# Altium PCB Trasmettitore_IR-1.1.PcbDoc
Units mm, origin at the board's own origin, x right, y up, seen from the top; angles counter-clockwise.
Board outline 27.4 x 16.4 mm, 4 copper layers (Top Layer, MidLayer1, MidLayer2, Bottom Layer); 62 components, 52 nets, 214 pads, 76 vias.
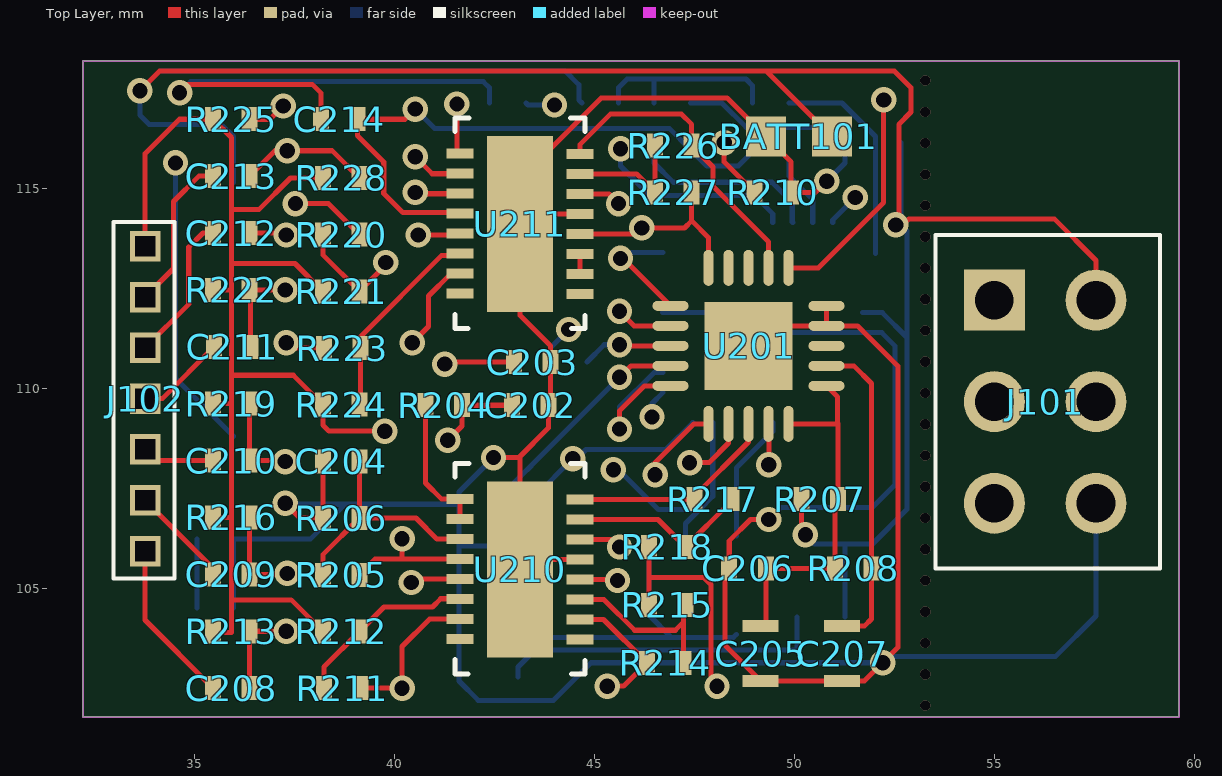
[diagram p0: Top Layer view]
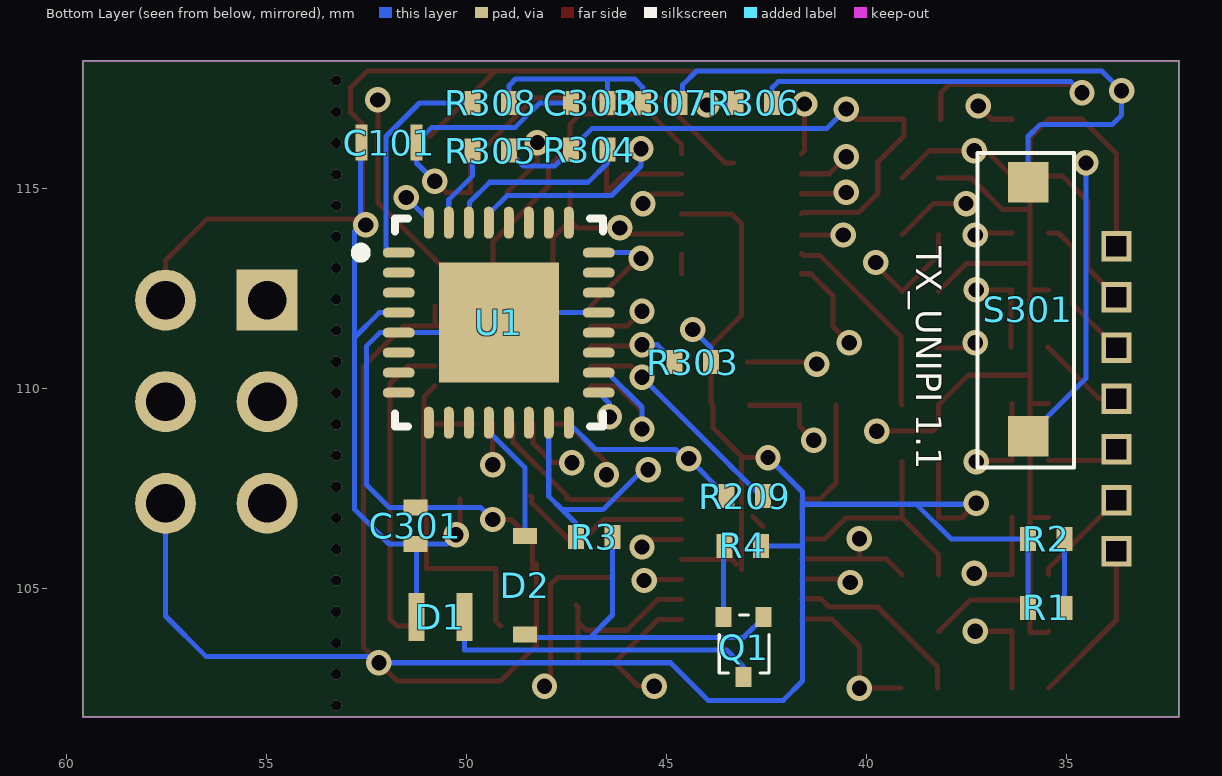
[diagram p1: Bottom Layer view, seen from below]
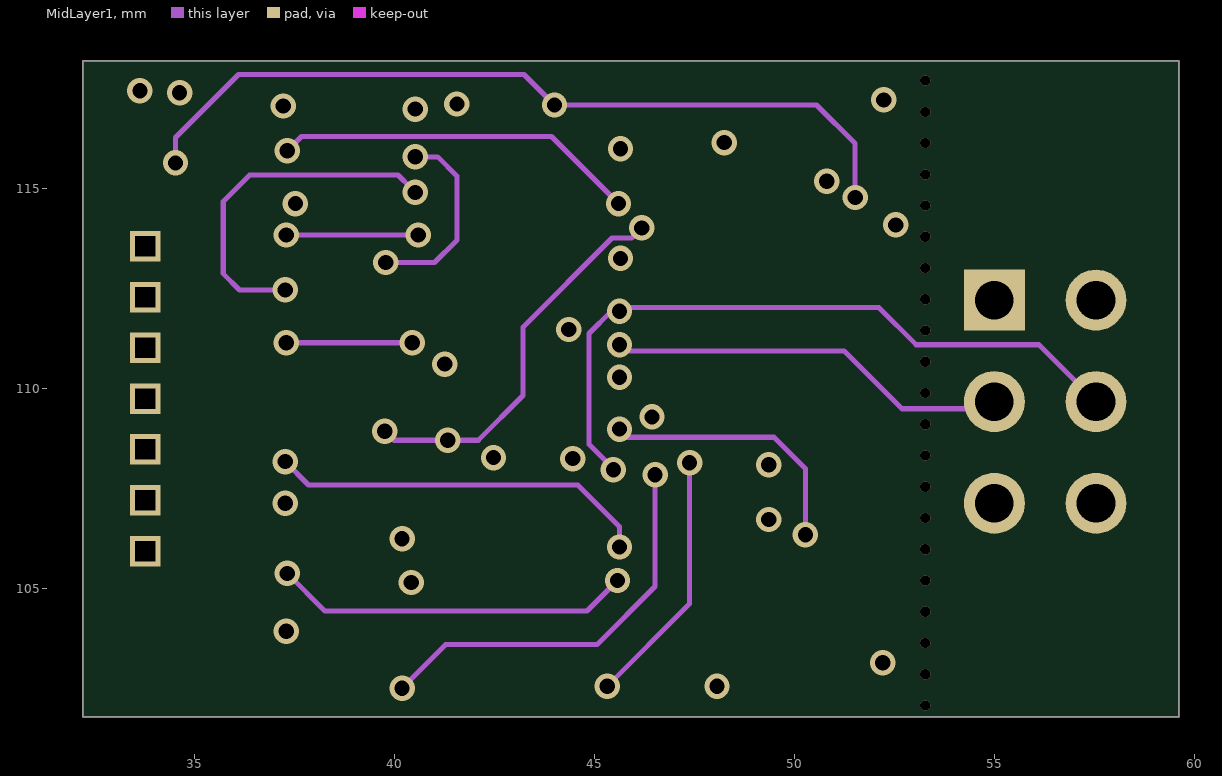
[diagram p2: MidLayer1]
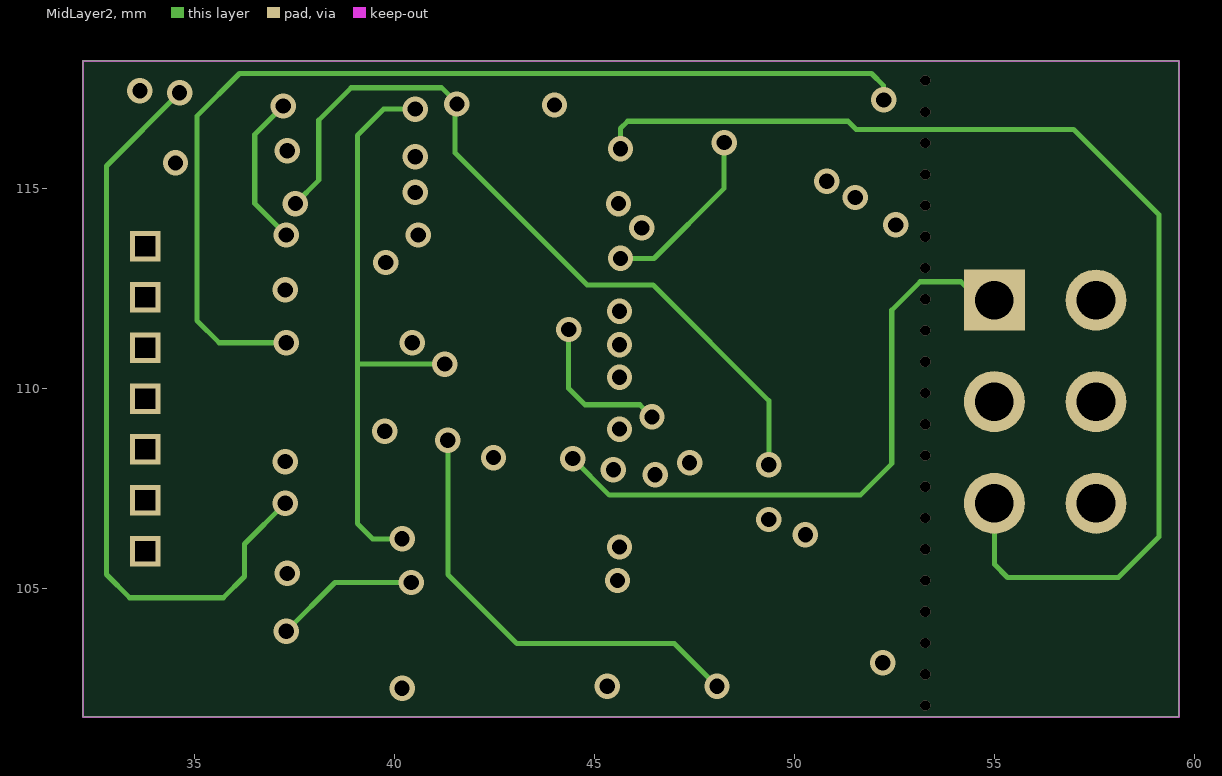
[diagram p3: MidLayer2]
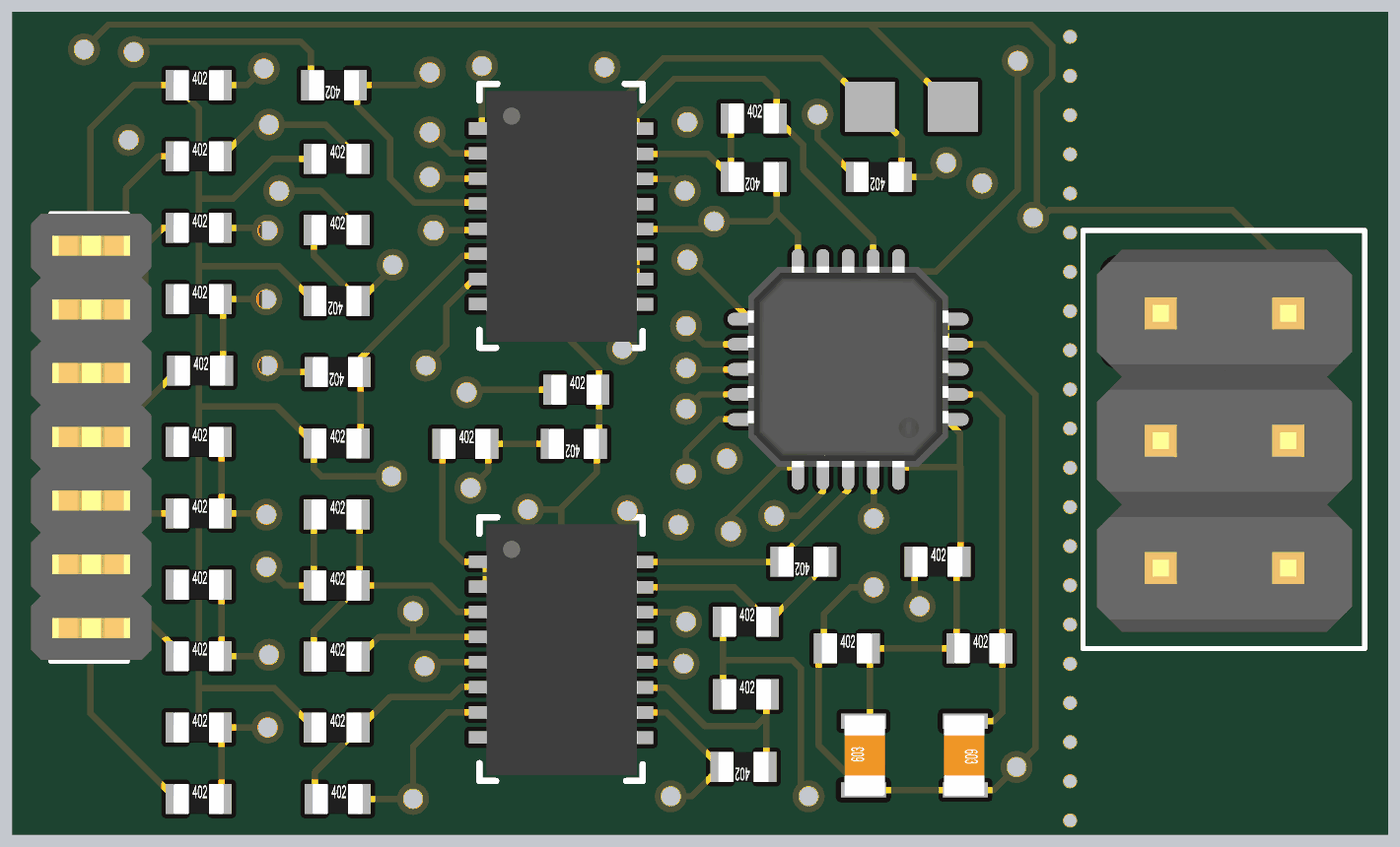
[diagram p4: 3D render of the assembled board from above, using the file's embedded part models]
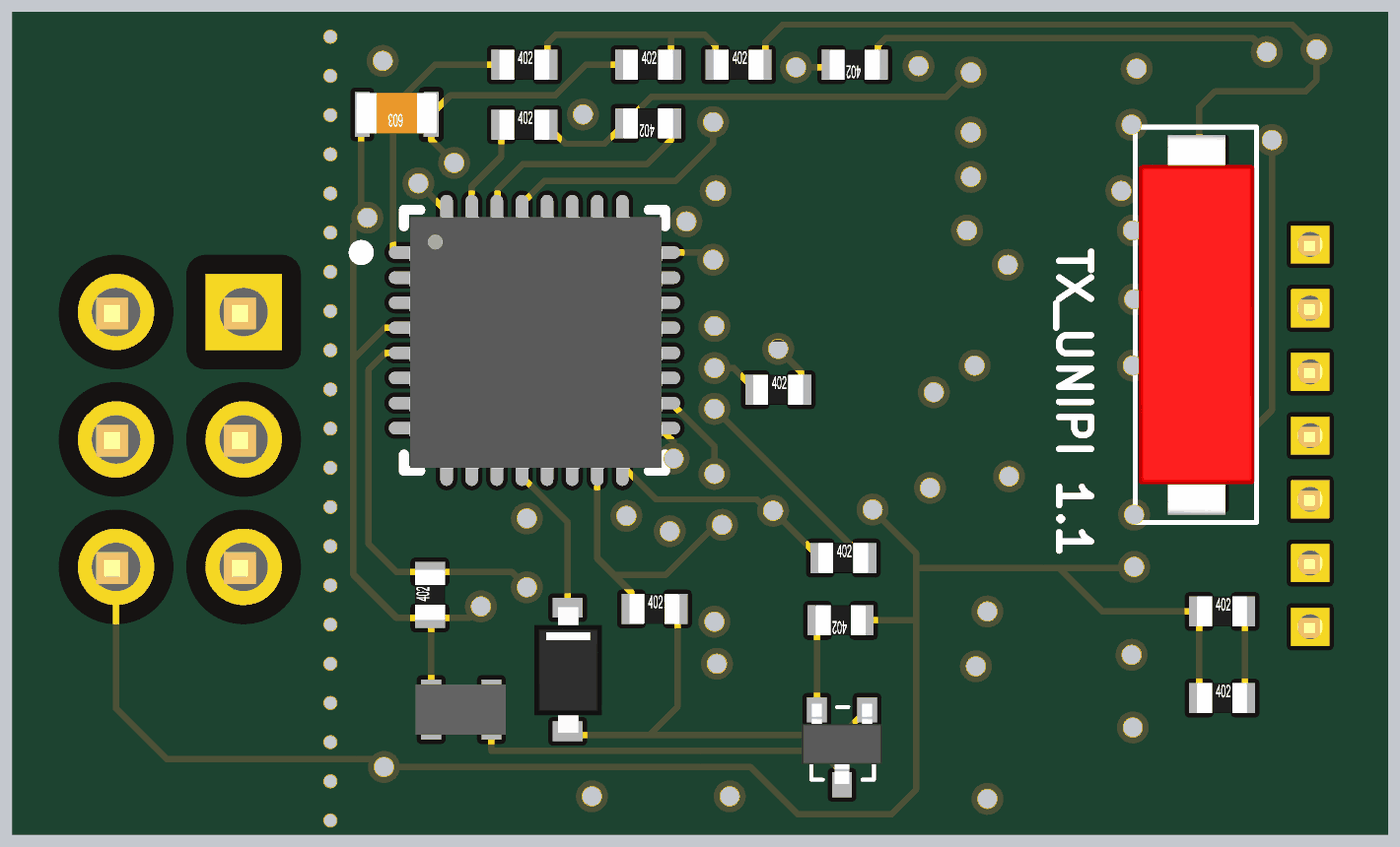
[diagram p5: 3D render of the assembled board from below, using the file's embedded part models]

## Layer stack, top to bottom
Top Layer: signal copper 0.0356
Dielectric: core 0.32, FR-4, Dk 4.8
MidLayer1: signal copper 0.0356
Dielectric: prepreg 0.32, FR-4, Dk 4.8
MidLayer2: signal copper 0.0356
Dielectric: core 0.32, FR-4, Dk 4.8
Bottom Layer: signal copper 0.0356

## Board outline
32.2,101.8 32.2,118.2 59.6,118.2 59.6,101.8

## Design rules (kind name [scope] priority, off if disabled: settings)
Clearance [All] p1: gap=0.127
HoleSize [All] p1: absolutevalues=TRUE maxlimit=1.27 minlimit=0.025 maxpercent=80.000 minpercent=20.000
MinimumSolderMaskSliver [All] p1: minsoldermaskwidth=0.025
PolygonConnect [All] p1: connectstyle=Relief reliefconductorwidth=0.254 reliefentries=4 polygonreliefangle="90 Angle" airgapwidth=0.254
RoutingVias [All] p1: holewidth=0.711 width=1.27 viastyle="Through Hole" minholewidth=0.711 minwidth=1.27 maxholewidth=0.711 maxwidth=1.27
SilkToSilkClearance [All] p1: silktosilkclearance=0.127
SilkToSolderMaskClearance [IsPad] p1: minsilkscreentomaskgap=0.076 clearancetoexposedcopper=TRUE
SolderMaskExpansion [All] p1: expansion=0.089
Width Width_1 [InNet('THP')] p1: maxlimit=0.4 minlimit=0.127 preferedwidth=0.127
Width [All] p2: maxlimit=0.127 minlimit=0.127 preferedwidth=0.127
24 further rules are at their usual default settings.

## Classes and differential pairs
component class ADC_AD7689: C205 C206 C207 R207 R208 R209 R210 U201
component class Ingresso_1.1SchDoc: C202 C203 C204 C208 C209 C210 C211 C212 C213 C214 J102 R204 R205 R206 R211 R212 R213 R214 R215 R216 R217 R218 R219 R220 R221 R222 R223 R224 R225 R226 R227 R228 U210 U211
component class MICRO_ATtiny88-MU: BATT101 C101 C301 C303 D1 D2 J101 Q1 R1 R2 R3 R4 R303 R304 R305 R306 R307 R308 S301 U1

## Components (designator, comment, footprint, x,y, rotation, side; value= is the part's Value field where it differs from the comment)
BATT101 "BATTERIA" BATT_3V 49.276,116.307 r0 top
C101 "10uF" "0603 CAPACITOR" 51.257,116.154 r0 bottom
C202 "0nF" "0402 CAPACITOR" 43.84,109.588 r180 top
C203 "100nF" "0402 CAPACITOR" 42.977,110.668 r0 top
C204 "10nF" "0402 CAPACITOR" 38.202,108.184 r0 top
C205 "1uF" "0603 CAPACITOR" 49.149,102.692 r90 top
C206 "100nF" "0402 CAPACITOR" 48.362,105.512 r0 top
C207 "10uF" "0603 CAPACITOR" 51.181,104.064 r270 top
C208 "100nF" "0402 CAPACITOR" 35.458,102.514 r0 top
C209 "100nF" "0402 CAPACITOR" 35.458,105.359 r0 top
C210 "100nF" "0402 CAPACITOR" 35.458,108.204 r0 top
C211 "100nF" "0402 CAPACITOR" 35.484,111.049 r0 top
C212 "100nF" "0402 CAPACITOR" 35.458,113.894 r0 top
C213 "100nF" "0402 CAPACITOR" 35.458,115.316 r0 top
C214 "100nF" "0402 CAPACITOR" 39.065,116.738 r180 top
C301 "100nF" "0402 CAPACITOR" 51.283,106.121 r90 bottom
C303 "27nF" "0402 CAPACITOR" 47.396,117.145 r180 bottom
D1 "Diodo IR" "DIODE IR" 51.257,104.292 r180 bottom
D2 "BAT42WS" SOD323-F 48.539,106.324 r270 bottom
J101 "Header 2x3" "HEADER 2X3" 54.94,112.243 r270 top
J102 "HEADER 1X7" "HEADER 1X7" 33.757,105.004 r90 top
Q1 "MMBT2222ALT1G" SOT-523 43.078,102.794 r90 bottom
R1 "0" "0402 RESISTOR" 35.966,104.496 r180 bottom
R2 "0" "0402 RESISTOR" 35.966,106.223 r180 bottom
R3 "2.2K" "0402 resistor" 47.269,106.274 r180 bottom
R4 "10" "0402 resistor" 42.647,106.096 r0 bottom
R204 "0" "0402 RESISTOR" 40.767,109.563 r0 top
R205 "10M" "0402 RESISTOR" 38.202,105.324 r0 top
R206 "10M" "0402 RESISTOR" 38.202,106.741 r0 top
R207 "4.3" "0402 RESISTOR" 50.165,107.213 r0 top
R208 "4.3" "0402 RESISTOR" 51.003,105.486 r0 top
R209 "1K" "0402 RESISTOR" 43.51,107.29 r180 bottom
R210 "680K" "0402 RESISTOR" 49.911,114.935 r180 top
R211 "2K" "0402 RESISTOR" 38.227,102.489 r0 top
R212 "2.7" "0402 RESISTOR" 38.202,103.906 r0 top
R213 "10M" "0402 RESISTOR" 35.458,103.911 r0 top
R214 "2K" "0402 RESISTOR" 47.219,103.175 r180 top
R215 "2.7" "0402 RESISTOR" 46.355,104.572 r0 top
R216 "10M" "0402 RESISTOR" 35.458,106.756 r0 top
R217 "2K" "0402 RESISTOR" 48.412,107.264 r180 top
R218 "2.7" "0402 RESISTOR" 46.355,106.02 r0 top
R219 "10M" "0402 RESISTOR" 35.458,109.601 r0 top
R220 "2K" "0402 RESISTOR" 38.202,113.828 r0 top
R221 "2.7" "0402 RESISTOR" 39.116,112.461 r180 top
R222 "10M" "0402 RESISTOR" 35.458,112.446 r0 top
R223 "2K" "0402 RESISTOR" 39.141,111.044 r180 top
R224 "2.7" "0402 RESISTOR" 38.202,109.576 r0 top
R225 "10M" "0402 RESISTOR" 35.458,116.713 r0 top
R226 "2K" "0402 RESISTOR" 46.507,116.053 r0 top
R227 "2K" "0402 RESISTOR" 47.422,114.935 r180 top
R228 "10M" "0402 RESISTOR" 38.202,115.245 r0 top
R303 "1K" "0402 RESISTOR" 44.806,110.642 r180 bottom
R304 "10" "0402 RESISTOR" 46.482,116.002 r0 bottom
R305 "10" "0402 RESISTOR" 49.86,115.926 r180 bottom
R306 "820K" "0402 RESISTOR" 42.367,117.17 r0 bottom
R307 "240K" "0402 RESISTOR" 45.593,117.119 r180 bottom
R308 "3.3K" "0402 RESISTOR" 49.86,117.119 r180 bottom
S301 "Switch reed" REED_SWITCH_SMD 35.966,108.814 r90 bottom
U1 "ATtiny88-MU" ATtiny48-MU 52.451,108.483 r180 bottom
U201 "AD7689" AD7689 51.537,113.767 r180 top
U210 "LTC6079-16" LTC6079DHC 43.129,105.486 r0 top
U211 "LTC6079-16" LTC6079DHC 43.129,114.122 r0 top

## Footprints (in the part's own frame and the unit in brackets; to place one, negate y for a bottom-side part, rotate by r counter-clockwise, add the part's x,y. Pads: shape width x height; smd on the part's side, far side on the other; paste and mask are expansions set on the pad)
"0402 CAPACITOR" [mm] "Footprint 0402 SMD capacitor"
  rect 0.4x0.6 smd: 1(0,0) 2(0.914,0)
  body extent -0.04,-0.3 0.96,0.3, height 0.2
"0402 RESISTOR" [mm] "0402 resistor SMD"
  rect 0.4x0.6 smd: 1(0,0.025) 2(0.914,0.025)
  body extent -0.04,-0.27 0.96,0.33, height 0.2
"0402 resistor" [mm] "0402 resistor SMD"
  rect 0.4x0.6 smd: 1(0,0.025) 2(0.914,0.025)
  body extent -0.04,-0.27 0.96,0.33, height 0.2
"0603 CAPACITOR" [mm] "SMD 0603 CAPACITOR"
  rect 0.3x0.9 smd mask+0.102: 1(0,0)
  rect 0.3x0.9 smd: 2(1.372,0)
  body extent -0.11,-0.43 1.49,0.37, height 0.3
AD7689 [mm] "AD7689 PulSAR ADC 250 kSPS 8 channel 16 bit"
  oval 0.9x0.25 smd: 1(0.742,3.692) 2(0.742,3.192) 3(0.742,2.692) 4(0.742,2.192) 5(0.742,1.692) 11(4.642,1.692) 12(4.642,2.192) 13(4.642,2.692) 14(4.642,3.192) 15(4.642,3.692)
  oval 0.25x0.9 smd: 6(1.692,0.742) 7(2.192,0.742) 8(2.692,0.742) 9(3.192,0.742) 10(3.692,0.742) 16(3.692,4.642) 17(3.192,4.642) 18(2.692,4.642) 19(2.192,4.642) 20(1.692,4.642)
  rect 2.2x2.2 smd: 21(2.692,2.692)
  body extent 0.69,0.64 4.69,4.64, height 1
ATtiny48-MU [mm] "ATtiny48-MU 32 pin, 8 bit, MLF-32"
  oval 0.8x0.25 smd: 1(0.751,4.919) 2(0.751,4.419) 3(0.751,3.919) 4(0.751,3.419) 5(0.751,2.919) 6(0.751,2.419) 7(0.751,1.919) 8(0.751,1.419) 17(5.751,1.419) 18(5.751,1.919) 19(5.751,2.419) 20(5.751,2.919) 21(5.751,3.419) 22(5.751,3.919) 23(5.751,4.419) 24(5.751,4.919)
  oval 0.25x0.8 smd: 9(1.501,0.669) 10(2.001,0.669) 11(2.501,0.669) 12(3.001,0.669) 13(3.501,0.669) 14(4.001,0.669) 15(4.501,0.669) 16(5.001,0.669) 25(5.001,5.669) 26(4.501,5.669) 27(4.001,5.669) 28(3.501,5.669) 29(3.001,5.669) 30(2.501,5.669) 31(2.001,5.669) 32(1.501,5.669)
  rect 3x3 smd: 33(3.251,3.169)
  silkscreen extent -0.32,0.57 5.85,5.77, body extent 0.77,0.62 5.79,5.64, height 0.85
BATT_3V [mm] "Batteria a bottone, 3V, non ricarivabile"
  rect 1x1 smd: 1(0,0) 2(1.651,0)
"DIODE IR" [mm] "DIODE IR (0603) 940nm"
  rect 0.4x1.2 smd: 1(0,0) 2(1.2,0)
  body extent -0.32,-0.5 1.48,0.5, height 0.55
"HEADER 1X7" [mil] "Header 1x7 pitch 1.27mm"
  rect 30x30 hole 19.68 square: 1(37,0) 2(87,0) 3(137,0) 4(187,0) 5(237,0) 6(287,0) 7(337,0)
  silkscreen extent 10,-29 361,31, body extent 11,-48 361,46, height 276
"HEADER 2X3" [mil] "header 2x3 pitch 2.54mm"
  rect 60x60 hole 37.99 mask+15: 1(1,2)
  round 60 hole 37.99 mask+15: 2(101,2) 3(201,2) 4(201,102) 5(101,102) 6(1,102)
  silkscreen extent -63,-56 265,165, body extent -48,-45 252,155, height 358
LTC6079DHC [mm] "Dual quad CMOS. LTC6079 DHC 16 lead"
  rect 0.675x0.25 smd: 1(-1.499,1.754) 2(-1.499,1.254) 3(-1.499,0.754) 4(-1.499,0.254) 5(-1.499,-0.246) 6(-1.499,-0.746) 7(-1.499,-1.246) 8(-1.499,-1.746) 9(1.499,-1.753) 10(1.499,-1.253) 11(1.499,-0.753) 12(1.499,-0.253) 13(1.499,0.247) 14(1.499,0.747) 15(1.499,1.247) 16(1.499,1.747)
  rect 1.65x4.4 smd: ""(0,0)
  silkscreen extent -1.63,-2.62 1.63,2.64, body extent -1.5,-2.5 1.52,2.5, height 0.75
REED_SWITCH_SMD [mil] "REED switch, SMD, glass"
  rect 40x40 smd: 1(0,0) 2(250,0)
  silkscreen extent -31,-45 279,50, body extent -25,-43 273,47, height 86
SOD323-F [mm] "BAT42WS, diodo SCHOTTKY"
  rect 0.4x0.6 smd: 1(0,0) 2(2.464,0)
  body extent -0.01,-0.66 2.49,0.69, height 1
SOT-523 [mm]
  rect 0.5x0.4 smd: 1(1.495,-0.5) 2(1.495,0.5) 3(0,0)
  silkscreen extent 0.1,-0.64 1.55,0.61, body extent 0.01,-0.8 1.61,0.8, height 0.8

## Part data
C101 C202 C203 C204 C205 C206 C207 C208 C209 C210 C211 C212 C213 C214 C301 C303: library part "Cap SMD", "Capacitor SMD 0402"
D1: library part Diode, "Default Diode"
D2: "MULTICOMP - BAT42WS - DIODO, SCHOTTKY, 0.2A, 30V, SOD323-F"
J101: "header 2x3, pitch 2.54mm"
J102: "Inductor"
Q1: "General Purpose Transistor, NPN Silicon, 3-Pin SOT-23, Pb-Free, Tape and Reel"
R1 R2 R3 R4 R204 R205 R206 R207 R208 R209 R210 R211 R212 R213 R214 R215 R216 R217 R218 R219 R220 R221 R222 R223 R224 R225 R226 R227 R228 R303 R304 R305 R306 R307 R308: library part RSMD, "Resistor SMD 0402"
S301: library part SW_Switch, "switch reed"
U1: "8-bit AVR Microcontroller, 1.8-5.5V, 8KB Flash, 64 Bytes EEPROM, 512 Bytes SRAM, 32-pin MLF, Industrial Grade (-40°C to 85°C), Pb-Free"
U201: "AD7689 PulSAR ADC 250kSPS 16bit 8 channel"
U210 U211: library part LT-LTC608X-LTC607X-16

## Via types
v1: diameter 0.635, hole 0.381, Top Layer to Bottom Layer, tented both sides, 55 vias
v2: diameter 0.254, hole 0.254, Top Layer to Bottom Layer, tented both sides, 21 vias

## Nets (pads, with @x,y where several pads share a name; then routed paths per layer and width w, separated by ;. In a path a pad name is that pad's centre, name@x,y a point inside that pad or via, vN(x,y) a via of type N, cw(c..) or ccw(c..) an arc to the next point about the centre after c; other vN are vias at no path point)
ADC_IN0: R211.2 U201.16 U210.7 | length 15.9
  Top Layer w0.127: R211.2 v1(40.183,102.514) 40.183,103.556 40.867,104.24 U210.7 ; v1(46.507,107.848) 46.507,108.153 47.478,109.124 U201.16
  MidLayer1 w0.127: v1(40.183,102.514) 41.275,103.607 45.06,103.607 46.507,105.054 v1@46.507,107.696
ADC_IN1: R214.2 U201.17 U210.10 | length 11.5
  Top Layer w0.127: U210.10 45.22,104.234 R214.2 45.72,102.565 v1(45.314,102.565) ; v1(47.371,108.153) 47.854,108.153 48.344,108.644 U201.17
  MidLayer1 w0.127: v1(45.314,102.565) 47.371,104.623 v1(47.371,108.153)
ADC_IN2: R217.2 U201.18 U210.16 | length 5.2
  Top Layer w0.127: U210.16 R217.2@47.417,107.234 ; R217.2 47.498,107.322 48.844,108.668 U201.18
ADC_IN3: R220.2 U201.19 U211.1 | length 23.8
  Top Layer w0.127: v1(37.516,114.63) 38.339,114.63 R220.2 ; v1(41.554,117.119) 41.554,115.952 U211.1 ; U201.19 49.352,109.116 v1(49.352,108.102)
  MidLayer2 w0.127: v1(37.516,114.63) 38.1,115.214 38.1,116.713 38.913,117.526 41.173,117.526 41.554,117.145 41.554,116.992 41.504,116.942 41.504,115.9 44.806,112.598 46.457,112.598 49.352,109.703 v1(49.352,108.102)
ADC_IN4: R223.2 U201.6 U211.7 | length 37.8
  Top Layer w0.127: v1(37.287,111.15) 37.419,111.018 R223.2 ; v1(40.437,111.15) 40.843,111.557 40.843,112.321 41.399,112.876 U211.7 ; U201.6 50.591,113.024 52.222,114.656 v1(52.222,117.221)
  MidLayer1 w0.127: v1(37.287,111.15) v1@40.386,111.15
  MidLayer2 w0.127: v1(37.287,111.15) 35.611,111.15 35.052,111.709 35.052,116.815 36.119,117.881 51.918,117.881 52.222,117.577 v1@52.222,117.119
ADC_IN5: R226.2 U201.7 U211.16 | length 7.8
  Top Layer w0.127: U211.16 44.628,116.103 45.39,116.865 47.168,116.865 47.422,116.611 R226.2 47.955,115.545 47.955,115.062 49.344,113.673 U201.7
CH0: C208.1 J102.1 | length 4.1
  Top Layer w0.127: J102.1 33.757,104.216 C208.1
CH1: C209.1 J102.2 | length 2.6
  Top Layer w0.127: J102.2 35.458,105.512 C209.1
CH2: C210.1 J102.3 | length 1.8
  Top Layer w0.127: J102.3 34.036,108.204 C210.1
CH3: C211.1 J102.4 | length 2.3
  Top Layer w0.127: J102.4 34.188,109.753 C211.1
CH4: C212.1 J102.5 | length 3.7
  Top Layer w0.127: J102.5 34.849,112.116 34.849,113.538 35.204,113.894 C212.1
CH5: C213.1 J102.6 | length 3.9
  Top Layer w0.127: J102.6 34.468,113.005 34.468,114.681 35.103,115.316 C213.1
CNV: R210.2 U1.24 U201.11 | length 9.1
  Top Layer w0.127: v1(45.644,113.259) 45.71,113.259 U201.11 ; v1@48.235,116.205 48.235,115.672 R210.2
  MidLayer2 w0.127: v1(45.644,113.259) 46.482,113.259 48.235,115.011 v1@48.235,116.205
  Bottom Layer w0.127: v1(45.644,113.259) 45.593,113.259 45.737,113.402 U1.24
  other v1: 48.235,116.154
ENATX: D2.1 U1.12 | length 3.2
  Bottom Layer w0.127: D2.1 48.539,108.021 49.45,108.931 U1.12
MISO: J101.1 R209.1 U1.16 | length 19.8
  MidLayer2 w0.127: v1(44.45,108.255) 45.364,107.34 51.638,107.34 52.426,108.128 52.426,111.963 53.137,112.674 54.153,112.674 J101.1@54.61,112.217
  Bottom Layer w0.127: R209.1 v1(44.45,108.255) ; v1@44.526,108.229 44.78,108.483 46.781,108.483 U1.16
MOSI: J101.5 R3.1 U1.15 U201.12 | length 24.5
  Top Layer w0.127: v1(45.618,111.938) 45.982,111.574 U201.12
  MidLayer1 w0.127: v1(45.466,107.975) 45.466,108.001 44.856,108.61 44.856,111.379 45.415,111.938 v1(45.618,111.938) 45.707,112.027 52.108,112.027 53.035,111.1 56.109,111.1 57.15,110.058 J101.5@57.15,109.677
  Bottom Layer w0.127: v1(45.466,107.975) 45.593,107.975 46.589,106.979 47.62,106.979 ; R3.1 47.269,106.629 47.62,106.979 ; U1.15 47.95,107.31 47.62,106.979
NetC204_2: C204.2 R205.1 R206.2 U210.3 | length 5.9
  Top Layer w0.127: R205.1 38.202,105.852 R206.2 ; C204.2 R206.2 ; U210.3 41.054,106.24 40.528,106.766 R206.2
NetC205_2: C205.2 C206.2 R207.2 R208.1 U201.1 U201.20 | length 9.2
  Top Layer w0.127: C205.2 49.276,104.191 C206.2 R208.1 51.003,107.163 R207.2 51.079,109.132 51.071,109.124 ; U201.20 51.071,109.124 ; U201.1 51.071,109.797 51.071,109.124
NetC207_1: C207.1 R208.2 U201.2 | length 8
  Top Layer w0.127: U201.2 51.478,110.574 51.918,110.134 51.918,104.242 51.74,104.064 C207.1
NetC208_2: C208.2 R213.2 U210.5 | length 7.2
  Top Layer w0.127: C208.2 R213.2 v1(37.287,103.937) ; v1(40.411,105.156) 40.496,105.24 U210.5
  MidLayer2 w0.127: v1(37.287,103.937) 38.506,105.156 v1(40.411,105.156)
NetC209_2: C209.2 R216.2 U210.12 | length 12.3
  Top Layer w0.127: R216.2 C209.2 37.287,105.359 v1(37.313,105.385) ; U210.12 45.541,105.234 v1(45.568,105.207)
  MidLayer1 w0.127: v1(37.313,105.385) 38.252,104.445 44.806,104.445 v1(45.568,105.207)
NetC210_2: C210.2 R219.2 U210.14 | length 13.3
  Top Layer w0.127: R219.2 C210.2 37.236,108.204 v1(37.262,108.179) ; U210.14 45.43,106.234 v1(45.618,106.045)
  MidLayer1 w0.127: v1(37.262,108.179) 37.846,107.594 44.577,107.594 45.618,106.553 v1(45.618,106.045) 45.618,105.867 45.568,105.816 v1@45.479,105.905
NetC211_2: C211.2 R222.2 U211.3 | length 12.3
  Top Layer w0.127: C211.2 36.398,112.446 R222.2 v1(37.262,112.471) ; v1@40.513,114.876 U211.3
  MidLayer1 w0.127: v1(37.262,112.471) 36.119,112.471 35.712,112.878 35.712,114.681 36.373,115.341 40.081,115.341 v1@40.411,115.011
  MidLayer2 w0.127: v1@40.411,114.757 v1@40.411,115.011
  other v1: 40.513,114.91
NetC212_2: C212.2 R225.2 U211.5 | length 10.3
  Top Layer w0.127: C212.2 37.236,113.894 v1(37.287,113.843) ; R225.2 36.881,116.738 v1(37.211,117.069) ; v1(40.589,113.843) U211.5@41.631,113.843
  MidLayer1 w0.127: v1(37.211,117.069) v1@37.211,117.297 ; v1(37.287,113.843) v1(40.589,113.843)
  MidLayer2 w0.127: v1(37.211,117.069) 36.5,116.357 36.5,114.63 v1(37.287,113.843)
NetC213_2: C213.2 R228.2 U211.14 | length 13.5
  Top Layer w0.127: C213.2 37.008,115.951 v1(37.313,115.951) 38.435,115.951 R228.2 ; U211.14 45.354,114.87 v1(45.593,114.63)
  MidLayer1 w0.127: v1(37.313,115.951) 37.668,116.307 43.917,116.307 v1(45.593,114.63)
NetC303_2: C303.2 R307.1 R308.2 | length 4.9
  Bottom Layer w0.127: R307.1 45.593,117.526 45.809,117.742 46.507,117.742 ; C303.2 46.482,117.717 46.507,117.742 ; R308.2 48.946,117.577 48.78,117.742 46.507,117.742
NetD1_2: D1.2 Q1.3 | length 8.2
  Bottom Layer w0.127: Q1.3 43.078,103.042 43.507,103.47 50.057,103.47 D1.2
NetD2_2: D2.2 Q1.1 R3.2 | length 8.9
  Bottom Layer w0.127: Q1.1 43.083,103.784 48.463,103.784 D2.2 ; R3.2 46.355,104.343 46.914,103.784
NetQ1_2: Q1.2 R4.2 | length 1.8
  Bottom Layer w0.127: R4.2 43.578,106.053 Q1.2
NetR1_2: R1.2 R2.2 | length 1.7
  Bottom Layer w0.127: R1.2 R2.2
NetR204_1: R204.1 U210.1 U210.2 | length 3.5
  Top Layer w0.127: R204.1 40.767,107.647 41.173,107.24 U210.1 U210.2
NetR209_2: R209.2 U201.14 | length 5.7
  Top Layer w0.127: v1(45.618,110.287) 45.906,110.574 U201.14
  Bottom Layer w0.127: R209.2 42.647,107.315 43.299,107.968 43.307,107.968 43.418,108.079 43.418,108.086 v1(45.618,110.287)
NetR211_1: R211.1 R212.2 U210.6 | length 4.6
  Top Layer w0.127: R211.1 38.227,103.043 R212.2 39.731,104.546 40.945,104.546 41.148,104.75 41.621,104.75 U210.6
NetR214_1: R214.1 R215.2 U210.11 | length 4.5
  Top Layer w0.127: U210.11 45.228,104.734 45.999,103.962 47.015,103.962 47.219,104.165 ; R214.1 47.219,104.165 ; R215.2 47.219,104.546 47.219,104.165
NetR217_1: R217.1 R218.2 U210.15 | length 4.7
  Top Layer w0.127: U210.15 46.581,106.734 R218.2 48.374,107.15 48.374,107.277 R217.1@48.412,107.315
NetR220_1: R220.1 R221.1 U211.2 | length 8.9
  Top Layer w0.127: R220.1 38.202,113.35 R221.1 39.776,113.096 v1(39.776,113.157) ; v1(40.513,115.799) 40.935,115.376 U211.2
  MidLayer1 w0.127: v1(39.776,113.157) 40.996,113.157 41.554,113.716 41.554,115.316 41.072,115.799 v1(40.513,115.799)
NetR223_1: R223.1 R224.2 U211.6 | length 5.1
  Top Layer w0.127: R224.2 39.141,109.626 R223.1 39.141,111.303 41.173,113.335 41.589,113.335 U211.6
NetR226_1: R226.1 R227.2 U211.15 | length 3.2
  Top Layer w0.127: U211.15 46.047,115.37 R227.2 R226.1
NetR303_2: R303.2 U1.17 | length 5.6
  MidLayer2 w0.127: v1(44.348,111.481) 44.348,110.007 44.755,109.601 46.126,109.601 v1(46.431,109.296)
  Bottom Layer w0.127: R303.2 43.891,111.023 v1(44.348,111.481) ; v1(46.431,109.296) 46.431,109.634 U1.17
NetU211_10: U211.10 U211.11 | length 0.5
  Top Layer w0.127: U211.10 U211.11
PORTANTE: U1.13
POWERON: R306.2 S301.1 U1.32 | length 29.4
  MidLayer1 w0.127: v1(34.519,115.646) 34.519,116.281 36.093,117.856 43.231,117.856 v1(43.993,117.094) 50.546,117.094 51.511,116.129 v1(51.511,114.783)
  Bottom Layer w0.127: v1(34.519,115.646) 34.519,110.261 S301.1 ; R306.2 43.332,117.094 v1(43.993,117.094) v1@43.993,117.061 ; U1.32 50.95,114.221 v1(51.511,114.783)
REF: C202.2 J102.7 R204.2 R212.1 R213.1 R215.1 R216.1 R218.1 R219.1 R221.2 R222.1 R224.1 R225.1 R227.1 R228.1 U201.10 U211.12 | length 65.4
  Top Layer w0.127: J102.7 33.757,115.875 34.62,116.738 R225.1 35.916,116.281 35.916,114.478 ; R213.1 35.484,103.911 35.916,103.911 35.916,104.724 ; R216.1 35.916,106.782 ; R219.1 35.916,109.626 ; R222.1 35.916,112.471 ; R212.1 37.409,104.724 35.916,104.724 ; R221.2 37.506,113.132 35.916,113.132 ; R228.1 37.394,115.27 36.601,114.478 35.916,114.478 ; v1(39.751,108.941) 38.354,108.941 38.202,109.093 R224.1 37.465,110.338 35.916,110.338 ; v1(41.326,108.712) 41.681,109.068 R204.2 C202.2 ; U211.12 46.026,113.87 v1(46.177,114.021) 47.244,114.021 47.422,114.198 ; R215.1 46.355,105.283 ; R218.1 46.355,105.283 ; R227.1 47.422,114.198 ; U201.10 47.844,113.776 47.422,114.198 ; v1@47.904,102.768 47.904,105.105 47.727,105.283 46.355,105.283 ; 35.916,104.724 35.916,106.782 ; 35.916,106.782 35.916,109.626 ; 35.916,109.626 35.916,110.338 ; 35.916,110.338 35.916,112.471 ; 35.916,112.471 35.916,113.132 ; 35.916,113.132 35.916,114.478
  MidLayer1 w0.127: v1(39.751,108.941) 39.98,108.712 v1(41.326,108.712) 42.088,108.712 43.205,109.83 43.205,111.539 45.433,113.767 45.923,113.767 v1(46.177,114.021)
  MidLayer2 w0.127: v1(41.326,108.712) 41.326,105.359 43.053,103.632 46.99,103.632 v1(48.057,102.565)
RESET: J101.3 U1.29 | length 34.4
  MidLayer2 w0.127: v1(45.644,116.002) 45.644,116.51 45.822,116.688 51.333,116.688 51.537,116.484 56.972,116.484 59.106,114.351 59.106,106.299 58.09,105.283 55.321,105.283 54.991,105.613 54.991,106.756 J101.3@54.61,107.137
  Bottom Layer w0.127: v1@45.644,116.027 45.644,115.57 46.38,114.833 48.99,114.833 49.45,114.373 U1.29
SCK: J101.2 R303.1 U201.13 | length 12
  Top Layer w0.127: v1(45.618,111.1) 45.644,111.074 U201.13
  MidLayer1 w0.127: v1(45.618,111.1) 45.771,110.947 51.232,110.947 52.68,109.499 54.432,109.499 J101.2@54.61,109.677 ; J101.2 J101.2@55.016,109.703
  Bottom Layer w0.127: R303.1 45.237,111.1 v1(45.618,111.1)
SHDNANA: U1.23
THP: BATT101.1 C101.1 C202.1 C203.2 C204.1 C205.1 C206.1 C207.2 C214.2 C301.2 C303.1 J101.4 R1.1 R2.1 R4.1 R206.1 R210.1 R306.1 U1.5 U1.21 U1.33 U201.4 U201.5 U201.21 U210. U210.13 U211. U211.13 | length 132.4
  Top Layer w0.127: v1(34.62,117.399) 34.823,117.602 37.948,117.602 38.151,117.399 C214.2 ; v1(37.262,107.137) 37.633,106.766 R206.1 C204.1 ; v1(42.469,108.28) 43.104,108.28 43.84,109.017 C202.1 43.891,109.639 C203.2 43.891,111.074 43.129,111.836 U211. 43.377,114.37 U211.13 ; U210.@42.596,106.553 U210.@42.843,106.8 ; U210. 43.129,108.306 ; U210.@43.256,105.613 43.377,105.734 U210.13 ; U211.@43.332,115.646 43.536,115.646 45.161,117.272 48.311,117.272 BATT101.1 49.911,115.672 R210.1 50.521,114.91 v1(50.8,115.189) ; C206.1@48.26,105.613 48.26,103.581 C205.1 C207.2 51.74,102.692 v1(52.197,103.149) 52.578,103.53 52.578,110.566 51.57,111.574 U201.4 ; C206.1 48.362,106.197 48.895,106.731 v1(49.352,106.731) ; U201.21 49.344,111.574 U201.4 ; U201.5 U201.4
  MidLayer2 w0.127: v1(34.62,117.399) 32.791,115.57 32.791,105.359 33.376,104.775 35.712,104.775 36.246,105.308 36.246,106.121 v1(37.262,107.137)
  Bottom Layer w0.127: v1(34.62,117.399) 34.9,117.678 42.215,117.678 42.367,117.526 R306.1 ; R1.1 R2.1 37.897,106.248 38.76,107.112 ; v1(37.262,107.137) 37.287,107.112 38.76,107.112 ; 41.605,106.07 R4.1 ; v1(42.469,108.28) 41.605,107.417 41.605,107.112 ; U1.21 48.95,111.902 U1.33 ; C303.1 48.176,117.145 48.786,116.535 50.876,116.535 C101.1 51.257,115.646 v1(50.8,115.189) ; v1(49.352,106.731) 49.657,107.036 C301.2 51.943,107.036 52.502,107.594 52.502,111.074 52.174,111.402 U1.5 U1.33@49.45,111.402 ; J101.4@57.15,107.137 57.531,106.756 57.531,104.318 56.515,103.302 52.349,103.302 v1(52.197,103.149) 44.907,103.149 43.967,102.21 42.088,102.21 41.605,102.692 41.605,107.112 ; 38.76,107.112 41.605,107.112
VCCA: C203.1 C214.1 R205.2 R304.2 R305.2 U210.4 U211.4 | length 34.4
  Top Layer w0.127: R205.2 39.507,105.74 40.183,105.74 ; v1(40.183,106.248) 40.183,105.74 ; 40.259,116.738 C214.1 39.065,116.332 39.726,115.672 39.726,114.884 40.208,114.402 41.605,114.402 U211.4 ; v1(41.25,110.617) 41.3,110.668 C203.1 ; U210.4 40.183,105.74
  MidLayer2 w0.127: v1(40.183,106.248) 39.446,106.248 39.065,106.629 39.065,110.617 ; v1(40.513,116.992) 39.726,116.992 39.065,116.332 39.065,110.617 ; v1(41.25,110.617) 39.065,110.617
  Bottom Layer w0.127: v1(40.513,116.992) 40.996,116.51 46.863,116.51 R304.2 47.803,115.57 48.59,115.57 48.946,115.926 R305.2
VCCANA1: R304.1 U1.30 | length 4.7
  Bottom Layer w0.127: R304.1 46.482,115.646 46.965,115.164 49.428,115.164 49.936,114.656 49.936,114.166 U1.30
VCCANA2: R305.1 U1.31 | length 1.8
  Bottom Layer w0.127: R305.1@49.86,115.722 49.86,115.316 50.45,114.726 U1.31
VCCD: BATT101.2 C101.2 C301.1 D1.1 J101.6 R207.1 R307.2 S301.2 U1.4 U1.18 U201.15 | length 75.2
  Top Layer w0.127: v1(33.63,117.45) 34.125,117.945 49.288,117.945 ; v1(45.618,108.991) 45.618,109.449 46.244,110.074 U201.15 ; R207.1 50.165,106.451 v1(50.267,106.35) ; BATT101.2 49.288,117.945 ; v1@52.603,114.097 52.603,116.611 52.908,116.916 52.908,117.526 52.489,117.945 49.288,117.945 ; v1@52.705,114.097 52.857,114.249 56.49,114.249 57.531,113.208 57.531,112.598 J101.6@57.15,112.217
  MidLayer1 w0.127: v1(45.618,108.991) 45.822,108.788 49.479,108.788 50.267,108.001 v1(50.267,106.35)
  Bottom Layer w0.127: S301.2 35.966,116.307 35.662,116.611 33.858,116.611 33.63,116.84 v1(33.63,117.45) 34.125,117.945 44.259,117.945 44.602,117.602 44.602,117.221 R307.2 ; v1(45.618,108.991) 45.618,109.542 46.479,110.402 U1.18 ; v1(50.267,106.35) 50.495,106.121 C301.1 ; D1.1 51.257,106.096 C301.1 ; U1.4 52.187,111.902 52.807,111.282 ; C101.2@52.654,116.154 52.654,114.097 52.807,113.944 52.807,111.282 ; C301.1 51.943,106.121 52.807,106.985 52.807,111.282
  other v1: 52.527,114.097
WAKEUP: R308.1 U1.1 | length 5.4
  Bottom Layer w0.127: R308.1 51.181,117.145 52.019,116.307 U1.1@52.019,113.386
pads on no net: U1.2 U1.3 U1.6 U1.7 U1.8 U1.9 U1.10 U1.11 U1.14 U1.19 U1.20 U1.22 U1.25 U1.26 U1.27 U1.28 U201.3 U201.8 U201.9 U210.8 U210.9 U211.8 U211.9
copper on no net:
  other v2: 53.264,102.083 53.264,102.864 53.264,103.645 53.264,104.426 53.264,105.207 53.264,105.988 53.264,106.769 53.264,107.55 53.264,108.331 53.264,109.112 53.264,109.893 53.264,110.674 53.264,111.455 53.264,112.236 53.264,113.017 53.264,113.798 53.264,114.579 53.264,115.36 53.264,116.141 53.264,116.923 53.264,117.704

## Keep-outs
Keep-Out Layer:
  the board outline again, w0.05

## Silkscreen, mask and mechanical layers (free items; w line width, h text height)
Bottom Overlay:
  text "TX_UNIPI 1.1" at 38.76,113.563 h0.64 r90
Mechanical 15:
  lines w0.102: 48.844,103.403 49.784,104.343 ; 49.073,115.646 49.835,114.884 ; 49.784,104.775 49.784,106.731 ; 49.784,107.188 49.784,108.255 ; 49.784,108.56 49.784,109.474 ; 49.784,109.957 49.784,110.82 ; 49.784,111.252 49.784,112.319 ; 49.784,112.624 49.784,114.529